# EAGLE board stencil_v2 (EAGLE 9.6.2)
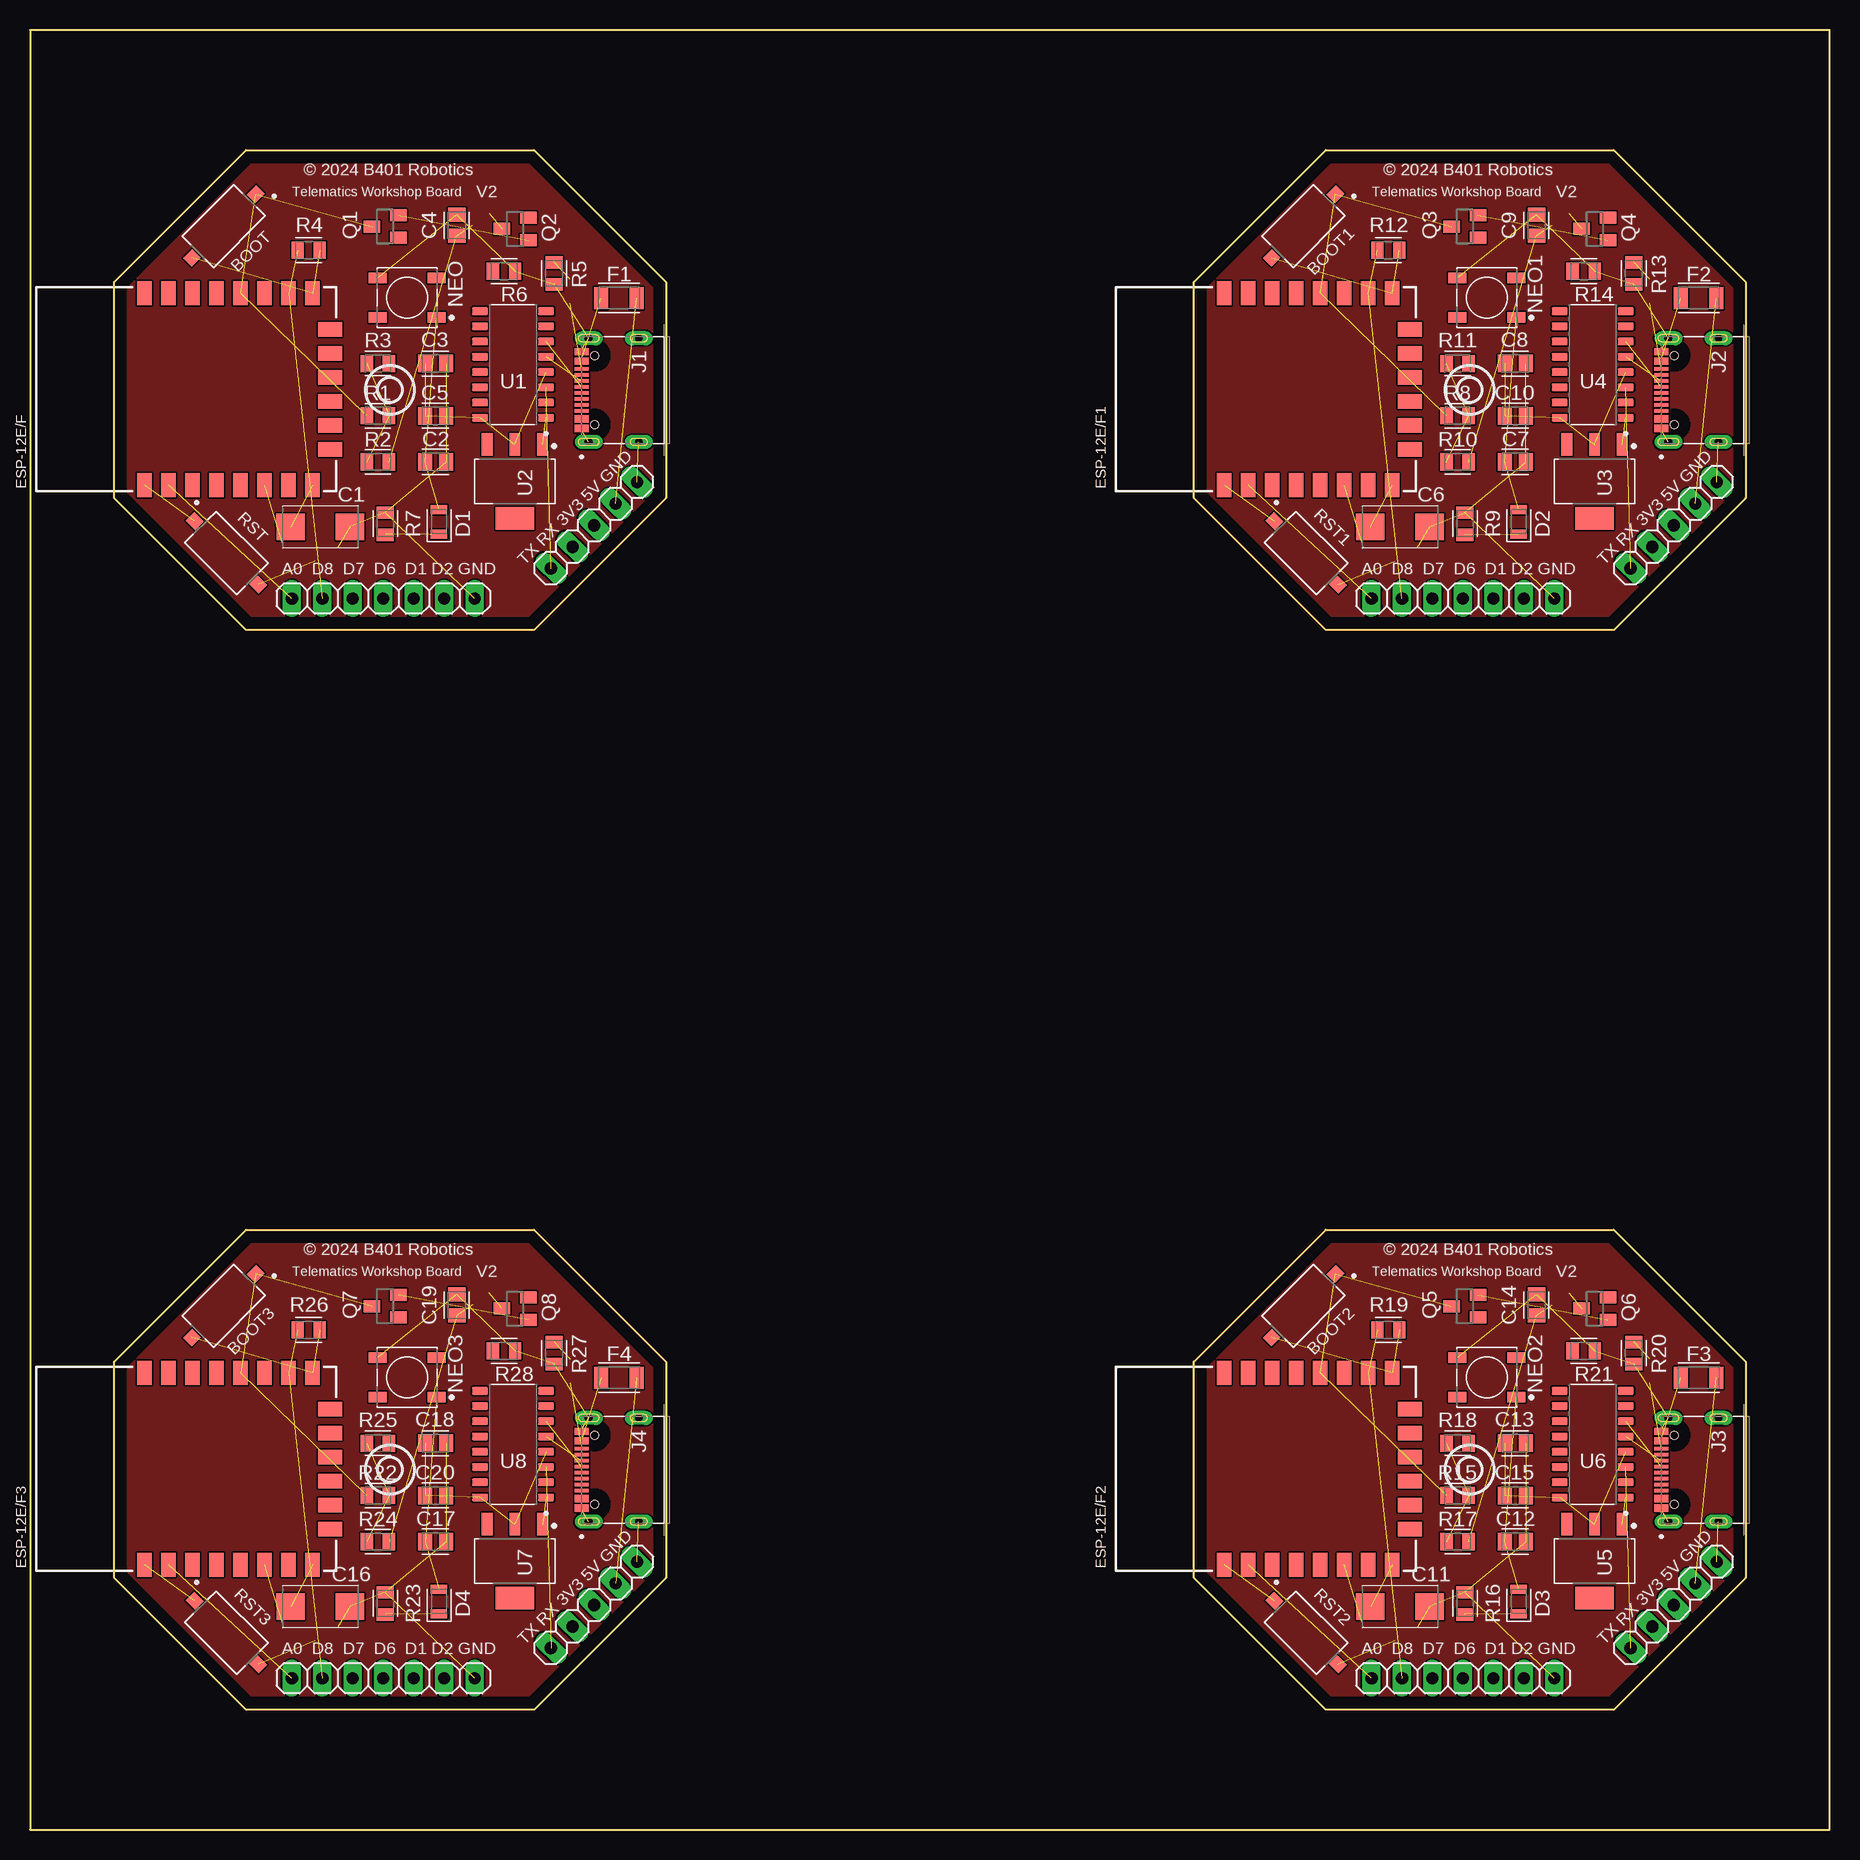
[diagram p0: board, top side]
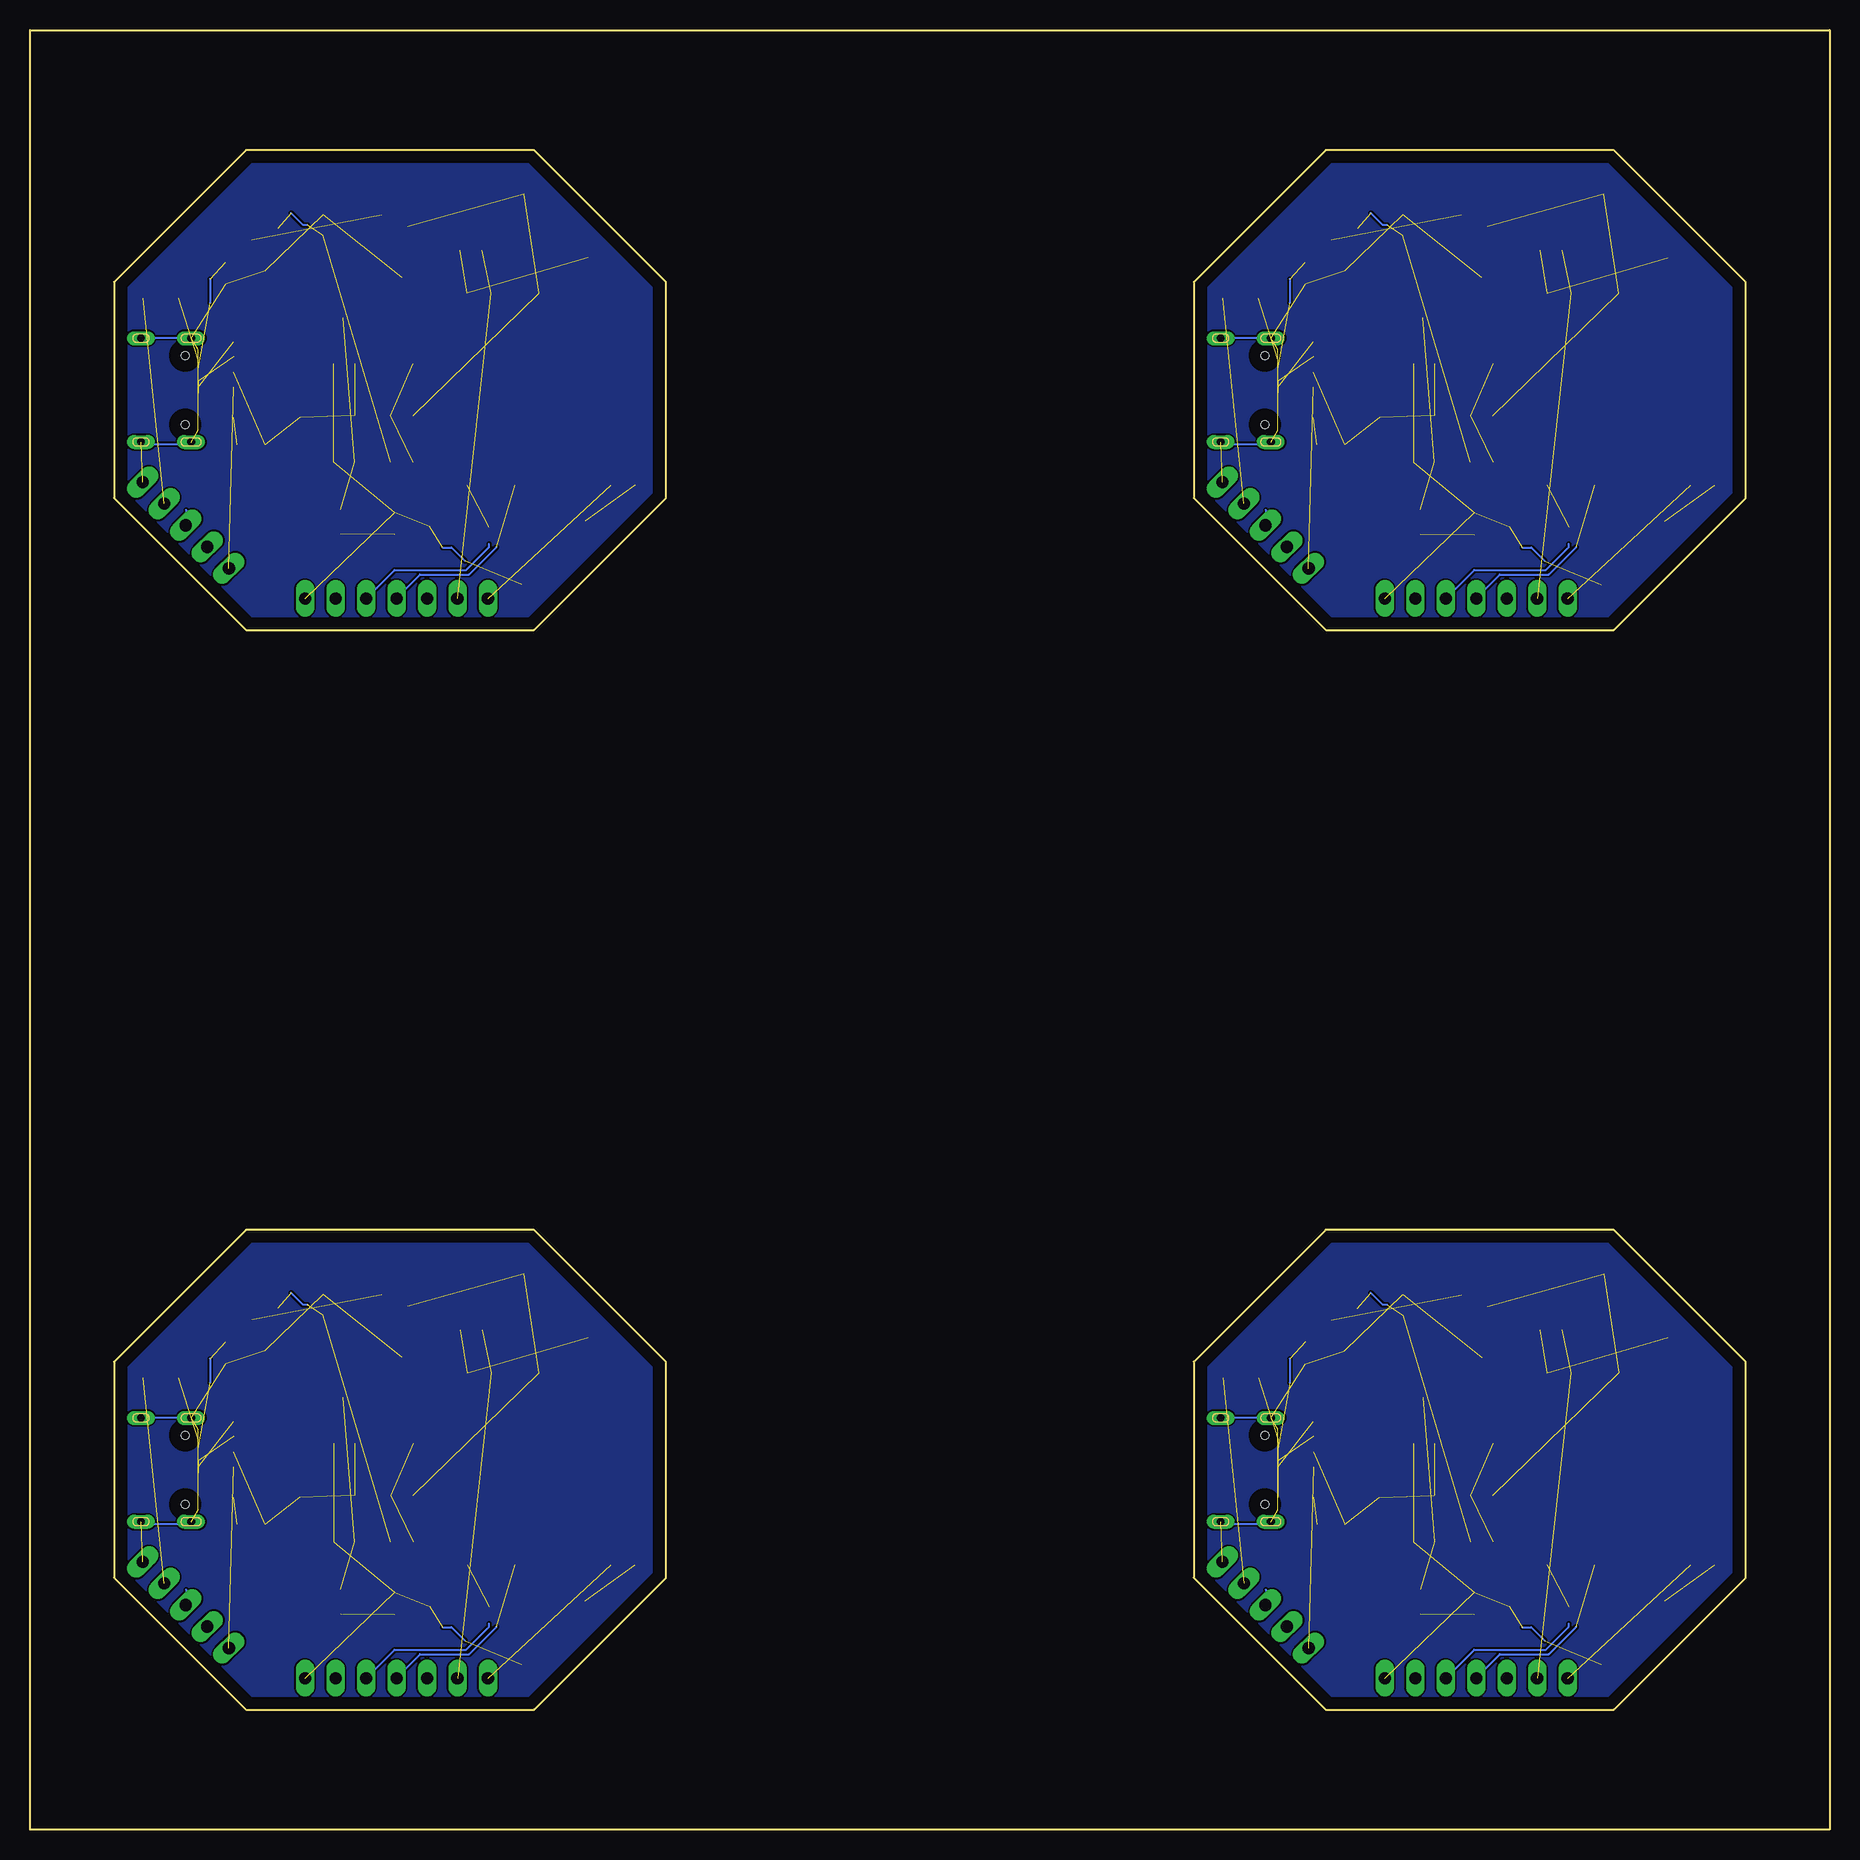
[diagram p1: board, bottom side, seen from below]

Size 150 x 150 mm. Coordinates in mm from the lower left corner, seen from the top.
Outline: 18,140 42,140 53,129 53,111 42,100 18,100 7,111 7,129 18,140
Outline: 108,140 132,140 143,129 143,111 132,100 108,100 97,111 97,129 108,140
Outline: 108,50 132,50 143,39 143,21 132,10 108,10 97,21 97,39 108,50
Outline: 18,50 42,50 53,39 53,21 42,10 18,10 7,21 7,39 18,50
Outline: 0,150 0,0 150,0 150,150 0,150
Copper layers (1*16): Top 0.035mm / dielectric 1.5mm / Bottom 0.035mm
Design rules "default *": minimum track width 6mil, minimum drill 0.35mm, track to track 6mil, track to pad 6mil, pad to pad 6mil, via to via 6mil, smd to smd 6mil, copper to edge 40mil, drill to drill 6mil, minimum pad ring 10mil, minimum via ring 8mil, stop-mask expansion 4mil, vias tented up to drill 0mil, thermal gap 10mil

## Footprints (pad centres in the part's own frame; a part is rotated, then mirrored left to right if it is on the bottom)
SWITCH-2P = smd 1.1 x 1: 1 -3.75,0; 2 3.75,0
CAPM6032X280 = smd 2.368 x 2.204: 1 -2.471,0; 2 2.471,0
CAPC2012X110 = smd 1.165 x 1.465: 1 -0.875,0; 2 0.875,0
LEDC2012X110N_FLAT-R = smd 0.762 x 1.362: A 1.025,0; C -1.025,0
ESP-12F = smd 2 x 1.2: 1 -8,3.48; 2 -8,1.48; 3 -8,-0.52; 4 -8,-2.52; 5 -8,-4.52; 6 -8,-6.52; 7 -8,-8.52; 8 -8,-10.52; 15 8,-10.52; 16 8,-8.52; 17 8,-6.52; 18 8,-4.52; 19 8,-2.52; 20 8,-0.52; 21 8,1.48; 22 8,3.48 | smd 1.2 x 2: 9 -5,-12; 10 -3,-12; 11 -1,-12; 12 1,-12; 13 3,-12; 14 5,-12
FUSC3215X82N = smd 1.165 x 1.814: 1 -1.475,0; 2 1.475,0
USB-C-16P = smd 0.3 x 1.14: A1 -3.35,0; A4 -2.55,0; A5 -1.25,0; A6 -0.25,0; A7 0.25,0; A8 1.25,0; A9 2.55,0; A12 3.35,0; B1 3.05,0; B4 2.25,0; B5 1.75,0; B6 0.75,0; B7 -0.75,0; B8 -1.75,0; B9 -2.25,0; B12 -3.05,0 | drill 0.65 pad 1 long: S1 -4.325,-0.59; S2 4.325,-0.59 | drill 0.65 pad 0.9 long: S3 -4.325,-4.77; S4 4.325,-4.77 | hole 0.65: -2.89,-1.07; 2.89,-1.07
1X05 = drill 1.016 long: 1 -5.08,0; 2 -2.54,0; 3 0,0; 4 2.54,0; 5 5.08,0
1X07 = drill 1.016 long: 1 -7.62,0; 2 -5.08,0; 3 -2.54,0; 4 0,0; 5 2.54,0; 6 5.08,0; 7 7.62,0
WS2812B = smd 1.5 x 0.9: 1 -2.45,1.65; 2 -2.45,-1.65; 3 2.45,-1.65; 4 2.45,1.65
SOT23 = smd 1 x 1.4: 1 -0.95,-1.1; 2 0.95,-1.1; 3 0,1.1
RESC2012X65 = smd 1.031 x 1.42: 1 -0.919,0; 2 0.919,0
SOIC127P600X180-16N = smd 1.31 x 0.62: 1 -2.75,4.445; 2 -2.75,3.175; 3 -2.75,1.905; 4 -2.75,0.635; 5 -2.75,-0.635; 6 -2.75,-1.905; 7 -2.75,-3.175; 8 -2.75,-4.445; 9 2.75,-4.445; 10 2.75,-3.175; 11 2.75,-1.905; 12 2.75,-0.635; 13 2.75,0.635; 14 2.75,1.905; 15 2.75,3.175; 16 2.75,4.445
SOT230P700X170-4 = smd 1.86 x 0.898: 1 -3.075,2.3; 2 -3.075,0; 3 -3.075,-2.3 | smd 1.86 x 3.189: 4 3.075,0

## Placement (x,y rotation side)
BOOT  BUTTON  [SWITCH-2P]  16.15,133.65 225 top
BOOT1  BUTTON  [SWITCH-2P]  106.15,133.65 225 top
BOOT2  BUTTON  [SWITCH-2P]  106.15,43.65 225 top
BOOT3  BUTTON  [SWITCH-2P]  16.15,43.65 225 top
C1  100µ  [CAPM6032X280]  24.2,108.59 180.1 top
C2  10µ  [CAPC2012X110]  33.8,114 0 top
C3  10µ  [CAPC2012X110]  33.8,122.2 0 top
C4  1µ  [CAPC2012X110]  35.57,133.72 90 top
C5  100n  [CAPC2012X110]  33.8,117.85 0 top
C6  100µ  [CAPM6032X280]  114.2,108.59 180.1 top
C7  10µ  [CAPC2012X110]  123.8,114 0 top
C8  10µ  [CAPC2012X110]  123.8,122.2 0 top
C9  1µ  [CAPC2012X110]  125.57,133.72 90 top
C10  100n  [CAPC2012X110]  123.8,117.85 0 top
C11  100µ  [CAPM6032X280]  114.2,18.59 180.1 top
C12  10µ  [CAPC2012X110]  123.8,24 0 top
C13  10µ  [CAPC2012X110]  123.8,32.2 0 top
C14  1µ  [CAPC2012X110]  125.57,43.72 90 top
C15  100n  [CAPC2012X110]  123.8,27.85 0 top
C16  100µ  [CAPM6032X280]  24.2,18.59 180.1 top
C17  10µ  [CAPC2012X110]  33.8,24 0 top
C18  10µ  [CAPC2012X110]  33.8,32.2 0 top
C19  1µ  [CAPC2012X110]  35.57,43.72 90 top
C20  100n  [CAPC2012X110]  33.8,27.85 0 top
D1  LED_RED  [LEDC2012X110N_FLAT-R]  34.1,109.01 90 top
D2  LED_RED  [LEDC2012X110N_FLAT-R]  124.1,109.01 90 top
D3  LED_RED  [LEDC2012X110N_FLAT-R]  124.1,19.01 90 top
D4  LED_RED  [LEDC2012X110N_FLAT-R]  34.1,19.01 90 top
ESP-12E/F  ESP-12F  [ESP-12F]  13.03,120.04 90 top
ESP-12E/F1  ESP-12F  [ESP-12F]  103.03,120.04 90 top
ESP-12E/F2  ESP-12F  [ESP-12F]  103.03,30.04 90 top
ESP-12E/F3  ESP-12F  [ESP-12F]  13.03,30.04 90 top
F1  FUSE PTC 1A  [FUSC3215X82N]  49.09,127.66 180 top
F2  FUSE PTC 1A  [FUSC3215X82N]  139.09,127.66 180 top
F3  FUSE PTC 1A  [FUSC3215X82N]  139.09,37.66 180 top
F4  FUSE PTC 1A  [FUSC3215X82N]  49.09,37.66 180 top
J1  USB-C  [USB-C-16P]  45.98,119.98 90 top
J2  USB-C  [USB-C-16P]  135.98,119.98 90 top
J3  USB-C  [USB-C-16P]  135.98,29.98 90 top
J4  USB-C  [USB-C-16P]  45.98,29.98 90 top
JP1  PINHD-1X5  [1X05]  47.01,108.71 225 top
JP2  HEADER_1X7  [1X07]  119.45,102.62 0 top
JP3  PINHD-1X5  [1X05]  137.01,108.71 225 top
JP4  HEADER_1X7  [1X07]  29.45,102.62 0 top
JP5  HEADER_1X7  [1X07]  119.45,12.62 0 top
JP6  PINHD-1X5  [1X05]  137.01,18.71 225 top
JP7  HEADER_1X7  [1X07]  29.45,12.62 0 top
JP8  PINHD-1X5  [1X05]  47.01,18.71 225 top
NEO  WS2812B  [WS2812B]  31.43,127.68 180 top
NEO1  WS2812B  [WS2812B]  121.43,127.68 180 top
NEO2  WS2812B  [WS2812B]  121.43,37.68 180 top
NEO3  WS2812B  [WS2812B]  31.43,37.68 180 top
Q1  BSS138  [SOT23]  29.61,133.62 90 top
Q2  BSS138  [SOT23]  40.44,133.42 90 top
Q3  BSS138  [SOT23]  119.61,133.62 90 top
Q4  BSS138  [SOT23]  130.44,133.42 90 top
Q5  BSS138  [SOT23]  119.61,43.62 90 top
Q6  BSS138  [SOT23]  130.44,43.42 90 top
Q7  BSS138  [SOT23]  29.61,43.62 90 top
Q8  BSS138  [SOT23]  40.44,43.42 90 top
R1  10K  [RESC2012X65]  29,117.85 0 top
R2  10k  [RESC2012X65]  29,114 180 top
R3  10K  [RESC2012X65]  29,122.2 180.2 top
R4  10K  [RESC2012X65]  23.23,131.64 0 top
R5  5.1K  [RESC2012X65]  43.69,129.71 90 top
R6  5.1K  [RESC2012X65]  39.52,129.9 180 top
R7  1K  [RESC2012X65]  29.62,108.85 270 top
R8  10K  [RESC2012X65]  119,117.85 0 top
R9  1K  [RESC2012X65]  119.62,108.85 270 top
R10  10k  [RESC2012X65]  119,114 180 top
R11  10K  [RESC2012X65]  119,122.2 180.2 top
R12  10K  [RESC2012X65]  113.23,131.64 0 top
R13  5.1K  [RESC2012X65]  133.69,129.71 90 top
R14  5.1K  [RESC2012X65]  129.52,129.9 180 top
R15  10K  [RESC2012X65]  119,27.85 0 top
R16  1K  [RESC2012X65]  119.62,18.85 270 top
R17  10k  [RESC2012X65]  119,24 180 top
R18  10K  [RESC2012X65]  119,32.2 180.2 top
R19  10K  [RESC2012X65]  113.23,41.64 0 top
R20  5.1K  [RESC2012X65]  133.69,39.71 90 top
R21  5.1K  [RESC2012X65]  129.52,39.9 180 top
R22  10K  [RESC2012X65]  29,27.85 0 top
R23  1K  [RESC2012X65]  29.62,18.85 270 top
R24  10k  [RESC2012X65]  29,24 180 top
R25  10K  [RESC2012X65]  29,32.2 180.2 top
R26  10K  [RESC2012X65]  23.23,41.64 0 top
R27  5.1K  [RESC2012X65]  43.69,39.71 90 top
R28  5.1K  [RESC2012X65]  39.52,39.9 180 top
RST  BUTTON  [SWITCH-2P]  16.38,106.41 315 top
RST1  BUTTON  [SWITCH-2P]  106.38,106.41 315 top
RST2  BUTTON  [SWITCH-2P]  106.38,16.41 315 top
RST3  BUTTON  [SWITCH-2P]  16.38,16.41 315 top
U1  CH340  [SOIC127P600X180-16N]  40.26,122.12 180 top
U2  NCP1117ST33T3G  [SOT230P700X170-4]  40.42,112.38 270 top
U3  NCP1117ST33T3G  [SOT230P700X170-4]  130.42,112.38 270 top
U4  CH340  [SOIC127P600X180-16N]  130.26,122.12 180 top
U5  NCP1117ST33T3G  [SOT230P700X170-4]  130.42,22.38 270 top
U6  CH340  [SOIC127P600X180-16N]  130.26,32.12 180 top
U7  NCP1117ST33T3G  [SOT230P700X170-4]  40.42,22.38 270 top
U8  CH340  [SOIC127P600X180-16N]  40.26,32.12 180 top

## Library data of the parts
BOOT BOOT1-BOOT3 RST RST1-RST3 = WorTel Libray 2024; MANUFACTURER: CUI Devices; MAXIMUM_PACKAGE_HEIGHT: 2.5 mm; PARTREV: 1.0; STANDARD: Manufacturer Recommendations
C1-C20 = Capacitor; CATEGORY: Capacitor
D1-D4 = LED; CATEGORY: LED; COLOR: RED; DESCRIPTION: CHIP LED FLAT; SUB-CATEGORY: CHIP; TYPE: FLAT_TOP
ESP-12E/F ESP-12E/F1-ESP-12E/F3 = WorTel Libray 2024
F1-F4 = Circuit-Protection; CATEGORY: Circuit-Protection; SUB-CATEGORY: Fuse
J1-J4 = WorTel Libray 2024; AVAILABILITY: In Stock; CHECK_PRICES: https://www.snapeda.com/parts/CSP-USC16-TR/Valcon/view-part/?ref=eda; DESCRIPTION: CSP-USC16-TR Valcon USB Type C Surface Mount PCB Socket; MF: Valcon; MP: CSP-USC16-TR; PACKAGE: None; PRICE: None; SNAPEDA_LINK: https://www.snapeda.com/parts/CSP-USC16-TR/Valcon/view-part/?ref=snap
JP1 JP3 JP6 JP8 = WorTel Libray 2024; CATEGORY: Headers; DESCRIPTION: Header, Straight, 5 Position; MANUFACTURER: Generic; MPN: Generic; OPERATING_TEMPERATURE: Generic; PART_STATUS: Active; PITCH: 0.100" (2.54mm); ROHS_COMPLIANCE: Generic; SERIES: Generic; SUB-CATEGORY: Headers, Male Pins; TYPE: Board to Board or Cable, Unshrouded, Through Hole, Straight
JP2 JP4 JP5 JP7 = WorTel Libray 2024; CATEGORY: Headers; DESCRIPTION: Header, Straight, 7 Position; MANUFACTURER: Generic; MPN: Generic; OPERATING_TEMPERATURE: Generic; PART_STATUS: Active; PITCH: 0.100" (2.54mm); ROHS_COMPLIANCE: Generic; SERIES: Generic; SUB-CATEGORY: Headers, Male Pins; TYPE: Board to Board or Cable, Unshrouded, Through Hole, Straight
NEO NEO1-NEO3 = LED; CATEGORY: LED; COLOR: RGB; DESCRIPTION: LED integrated light source; MANUFACTURER: Worldsemi; MPN: WS2812B; OPERATING_TEMP: -25 ℃ to +80℃(TJ); PART_STATUS: Active; SUB_CATEGORY: RGB
Q1-Q8 = Transistor; CATEGORY: Transistor; SUB-CATEGORY: MOSFET; TYPE: N-Channel
R1-R28 = Resistor; CATEGORY: Resistor; SUB-CATEGORY: Fixed
U1 U4 U6 U8 = WorTel Libray 2024; AVAILABILITY: Not in stock; CHECK_PRICES: https://www.snapeda.com/parts/CH340C/WCH/view-part/?ref=eda; DESCRIPTION: USB to serial chip CH340; MF: WCH; MP: CH340C; PACKAGE: None; PRICE: None; SNAPEDA_LINK: https://www.snapeda.com/parts/CH340C/WCH/view-part/?ref=snap
U2 U3 U5 U7 = IC_Power-Management; CATEGORY: IC_Power-Management; MANUFACTURER: ON Semiconductor; MPN: NCP1117ST33T3G; OPERATING_TEMP: 0 to +125 °C; PART_STATUS: Active; ROHS_COMPLIANT: RoHS3 Compliant; SERIES: NCP1117, NCV1117; SUB-CATEGORY: Voltage Regulator; TYPE: Linear

## Nets
+3.3V: C3.1 C5.1 U1.4 U1.16 U2.2
+3.3V1: C8.1 C10.1 U3.2 U4.4 U4.16
+3.3V2: C13.1 C15.1 U5.2 U6.4 U6.16
+3.3V3: C18.1 C20.1 U7.2 U8.4 U8.16
+5V: F1.1 JP1.2
+5V1: F2.1 JP3.2
+5V2: F3.1 JP6.2
+5V3: F4.1 JP8.2
+5V_BF: F1.2 J1.A4 J1.A9 J1.B4 J1.B9
+5V_BF1: F2.2 J2.A4 J2.A9 J2.B4 J2.B9
+5V_BF2: F3.2 J3.A4 J3.A9 J3.B4 J3.B9
+5V_BF3: F4.2 J4.A4 J4.A9 J4.B4 J4.B9
ADC0: ESP-12E/F.2 JP4.1
ADC1: ESP-12E/F1.2 JP2.1
ADC2: ESP-12E/F2.2 JP5.1
ADC3: ESP-12E/F3.2 JP7.1
EN: ESP-12E/F.3
EN1: ESP-12E/F1.3
EN2: ESP-12E/F2.3
EN3: ESP-12E/F3.3
ESP_RX: JP1.4
ESP_RX1: JP3.4
ESP_RX2: JP6.4
ESP_RX3: JP8.4
ESP_TX: JP1.5 U1.3
ESP_TX1: JP3.5 U4.3
ESP_TX2: JP6.5 U6.3
ESP_TX3: JP8.5 U8.3
EXP_RX: U1.2
EXP_RX1: U4.2
EXP_RX2: U6.2
EXP_RX3: U8.2
GND: C4.2 J1.A1 J1.A12 J1.B1 J1.B12 J1.S1 J1.S2 J1.S3 J1.S4 JP1.1 NEO.3 R5.1 R6.1
GND1: C9.2 J2.A1 J2.A12 J2.B1 J2.B12 J2.S1 J2.S2 J2.S3 J2.S4 JP3.1 NEO1.3 R13.1 R14.1
GND2: C14.2 J3.A1 J3.A12 J3.B1 J3.B12 J3.S1 J3.S2 J3.S3 J3.S4 JP6.1 NEO2.3 R20.1 R21.1
GND3: C19.2 J4.A1 J4.A12 J4.B1 J4.B12 J4.S1 J4.S2 J4.S3 J4.S4 JP8.1 NEO3.3 R27.1 R28.1
IO0: BOOT.1 ESP-12E/F.18 Q1.3 R1.1
IO1: BOOT1.1 ESP-12E/F1.18 Q3.3 R8.1
IO2: ESP-12E/F.17
IO3: ESP-12E/F1.6 JP2.4
IO4: ESP-12E/F.19
IO5: ESP-12E/F.20
IO6: JP2.3
IO7: ESP-12E/F1.5
IO8: ESP-12E/F1.19
IO9: ESP-12E/F1.20
IO10: ESP-12E/F1.4
IO11: ESP-12E/F1.17
IO12: ESP-12E/F.6 JP4.4
IO13: JP4.3
IO14: ESP-12E/F.5
IO15: ESP-12E/F.16 JP4.2 R4.1
IO16: ESP-12E/F.4
IO17: ESP-12E/F1.16 JP2.2 R12.1
IO18: BOOT2.1 ESP-12E/F2.18 Q5.3 R15.1
IO19: ESP-12E/F2.6 JP5.4
IO20: JP5.3
IO21: ESP-12E/F2.5
IO22: ESP-12E/F2.19
IO23: ESP-12E/F2.20
IO24: ESP-12E/F2.4
IO25: ESP-12E/F2.17
IO26: ESP-12E/F2.16 JP5.2 R19.1
IO27: BOOT3.1 ESP-12E/F3.18 Q7.3 R22.1
IO28: ESP-12E/F3.6 JP7.4
IO29: JP7.3
IO30: ESP-12E/F3.5
IO31: ESP-12E/F3.19
IO32: ESP-12E/F3.20
IO33: ESP-12E/F3.4
IO34: ESP-12E/F3.17
IO35: ESP-12E/F3.16 JP7.2 R26.1
N$1: J1.A6 J1.B6 U1.5
N$2: J1.A7 J1.B7 U1.6
N$4: Q1.2 Q2.1
N$5: J1.B5 R5.2
N$6: R6.2
N$8: Q2.2
N$9: D1.C R7.2
N$10: D2.C R9.2
N$11: J2.A6 J2.B6 U4.5
N$12: J2.A7 J2.B7 U4.6
N$13: Q3.2 Q4.1
N$14: Q4.2
N$15: J2.B5 R13.2
N$16: R14.2
N$19: D3.C R16.2
N$20: J3.A6 J3.B6 U6.5
N$21: J3.A7 J3.B7 U6.6
N$22: Q5.2 Q6.1
N$23: Q6.2
N$24: J3.B5 R20.2
N$25: R21.2
N$28: D4.C R23.2
N$29: J4.A6 J4.B6 U8.5
N$30: J4.A7 J4.B7 U8.6
N$31: Q7.2 Q8.1
N$32: Q8.2
N$33: J4.B5 R27.2
N$34: R28.2
RST: C4.1 Q2.3 R2.1
RST1: C9.1 Q4.3 R10.1
RST2: C14.1 Q6.3 R17.1
RST3: C19.1 Q8.3 R24.1
S$1: C1.2 ESP-12E/F.8
S$2: R1.2 R2.2 R3.2
S$3: JP1.3
S$4: C1.1 C2.2 C3.2 C5.2 JP4.7 R7.1 RST.2
S$5: U1.1 U2.1
S$6: BOOT.2 ESP-12E/F.15 R4.2
S$7: ESP-12E/F.1 RST.1
S$8: R3.1
S$9: ESP-12E/F.21
S$10: ESP-12E/F.22
S$11: C2.1 D1.A NEO.1
S$12: U2.3
S$13: ESP-12E/F.7
S$14: NEO.4
S$15: JP4.6
S$16: JP4.5
S$17: U1.13
S$18: Q1.1
S$19: U1.14
S$20: J1.A5
S$21: C6.2 ESP-12E/F1.8
S$22: R8.2 R10.2 R11.2
S$23: JP3.3
S$24: U3.1 U4.1
S$25: C6.1 C7.2 C8.2 C10.2 JP2.7 R9.1 RST1.2
S$26: BOOT1.2 ESP-12E/F1.15 R12.2
S$27: ESP-12E/F1.1 RST1.1
S$28: R11.1
S$29: ESP-12E/F1.21
S$30: ESP-12E/F1.22
S$31: U3.3
S$32: C7.1 D2.A NEO1.1
S$33: ESP-12E/F1.7
S$34: NEO1.4
S$35: JP2.6
S$36: JP2.5
S$37: U4.13
S$38: Q3.1
S$39: U4.14
S$40: J2.A5
S$41: C11.2 ESP-12E/F2.8
S$42: R15.2 R17.2 R18.2
S$43: JP6.3
S$44: U5.1 U6.1
S$45: C11.1 C12.2 C13.2 C15.2 JP5.7 R16.1 RST2.2
S$46: BOOT2.2 ESP-12E/F2.15 R19.2
S$47: ESP-12E/F2.1 RST2.1
S$48: R18.1
S$49: ESP-12E/F2.21
S$50: ESP-12E/F2.22
S$51: U5.3
S$52: C12.1 D3.A NEO2.1
S$53: ESP-12E/F2.7
S$54: NEO2.4
S$55: JP5.6
S$56: JP5.5
S$57: U6.13
S$58: Q5.1
S$59: U6.14
S$60: J3.A5
S$61: C16.2 ESP-12E/F3.8
S$62: R22.2 R24.2 R25.2
S$63: JP8.3
S$64: U7.1 U8.1
S$65: C16.1 C17.2 C18.2 C20.2 JP7.7 R23.1 RST3.2
S$66: BOOT3.2 ESP-12E/F3.15 R26.2
S$67: ESP-12E/F3.1 RST3.1
S$68: R25.1
S$69: ESP-12E/F3.21
S$70: ESP-12E/F3.22
S$71: U7.3
S$72: C17.1 D4.A NEO3.1
S$73: ESP-12E/F3.7
S$74: NEO3.4
S$75: JP7.6
S$76: JP7.5
S$77: U8.13
S$78: Q7.1
S$79: U8.14
S$80: J4.A5

## Tracks (layer width: path | path; a pad name or v marks a point on that pad's centre or on a via)
+3.3V  (4 unrouted)
+3.3V1  (4 unrouted)
+3.3V2  (4 unrouted)
+3.3V3  (4 unrouted)
+5V  (1 unrouted)
+5V1  (1 unrouted)
+5V2  (1 unrouted)
+5V3  (1 unrouted)
+5V_BF  (4 unrouted)
+5V_BF1  (4 unrouted)
+5V_BF2  (4 unrouted)
+5V_BF3  (4 unrouted)
ADC0  (1 unrouted)
ADC1  (1 unrouted)
ADC2  (1 unrouted)
ADC3  (1 unrouted)
ESP_TX  (1 unrouted)
ESP_TX1  (1 unrouted)
ESP_TX2  (1 unrouted)
ESP_TX3  (1 unrouted)
GND  (10 unrouted)
  Bottom 0.152: 46.75,115.5 46.62,115.62 J1.S1 46.75,115.5 | 46.75,115.5 50.5,115.5 50.62,115.62 J1.S3 | J1.S2 46.62,124.38 50.62,124.38 J1.S4
GND1  (10 unrouted)
  Bottom 0.152: 136.75,115.5 136.62,115.62 J2.S1 136.75,115.5 | 136.75,115.5 140.5,115.5 140.62,115.62 J2.S3 | J2.S2 136.62,124.38 140.62,124.38 J2.S4
GND2  (10 unrouted)
  Bottom 0.152: 136.75,25.5 136.62,25.62 J3.S1 136.75,25.5 | 136.75,25.5 140.5,25.5 140.62,25.62 J3.S3 | J3.S2 136.62,34.38 140.62,34.38 J3.S4
GND3  (10 unrouted)
  Bottom 0.152: 46.75,25.5 46.62,25.62 J4.S1 46.75,25.5 | 46.75,25.5 50.5,25.5 50.62,25.62 J4.S3 | J4.S2 46.62,34.38 50.62,34.38 J4.S4
IO0  (3 unrouted)
IO1  (3 unrouted)
IO3  (1 unrouted)
  Bottom 0.152: JP2.4 119.5,102.62 117.5,104.62 113.4,104.62 111.12,106.9
IO12  (1 unrouted)
  Bottom 0.152: JP4.4 29.5,102.62 27.5,104.62 23.4,104.62 21.12,106.9
IO15  (2 unrouted)
IO17  (2 unrouted)
IO18  (3 unrouted)
IO19  (1 unrouted)
  Bottom 0.152: JP5.4 119.5,12.62 117.5,14.62 113.4,14.62 111.12,16.9
IO26  (2 unrouted)
IO27  (3 unrouted)
IO28  (1 unrouted)
  Bottom 0.152: JP7.4 29.5,12.62 27.5,14.62 23.4,14.62 21.12,16.9
IO35  (2 unrouted)
N$1  (2 unrouted)
N$2  (2 unrouted)
N$3
  pour Top: 53.92,111.03 53.92,129.42 53.48,129.42 53.46,129.44 42.47,140.42 17.53,140.42 6.58,129.47 6.58,110.53 17.53,99.58 42.47,99.58
N$4  (1 unrouted)
N$5  (2 unrouted)
  Bottom 0.152: 45,129.25 45,127.25
N$7
  pour Bottom: 53.92,111.03 53.92,129.42 53.48,129.42 53.46,129.44 42.47,140.42 17.53,140.42 6.58,129.47 6.58,110.53 17.53,99.58 42.47,99.58
N$9  (1 unrouted)
N$10  (1 unrouted)
N$11  (2 unrouted)
N$12  (2 unrouted)
N$13  (1 unrouted)
N$15  (2 unrouted)
  Bottom 0.152: 135,129.25 135,127.25
N$17
  pour Top: 143.92,111.03 143.92,129.42 143.48,129.42 143.46,129.44 132.47,140.42 107.53,140.42 96.58,129.47 96.58,110.53 107.53,99.58 132.47,99.58
N$18
  pour Bottom: 143.92,111.03 143.92,129.42 143.48,129.42 143.46,129.44 132.47,140.42 107.53,140.42 96.58,129.47 96.58,110.53 107.53,99.58 132.47,99.58
N$19  (1 unrouted)
N$20  (2 unrouted)
N$21  (2 unrouted)
N$22  (1 unrouted)
N$24  (2 unrouted)
  Bottom 0.152: 135,39.25 135,37.25
N$26
  pour Top: 143.92,21.03 143.92,39.42 143.48,39.42 143.46,39.44 132.47,50.42 107.53,50.42 96.58,39.47 96.58,20.53 107.53,9.58 132.47,9.58
N$27
  pour Bottom: 143.92,21.03 143.92,39.42 143.48,39.42 143.46,39.44 132.47,50.42 107.53,50.42 96.58,39.47 96.58,20.53 107.53,9.58 132.47,9.58
N$28  (1 unrouted)
N$29  (2 unrouted)
N$30  (2 unrouted)
N$31  (1 unrouted)
N$33  (2 unrouted)
  Bottom 0.152: 45,39.25 45,37.25
N$35
  pour Top: 53.92,21.03 53.92,39.42 53.48,39.42 53.46,39.44 42.47,50.42 17.53,50.42 6.58,39.47 6.58,20.53 17.53,9.58 42.47,9.58
N$36
  pour Bottom: 53.92,21.03 53.92,39.42 53.48,39.42 53.46,39.44 42.47,50.42 17.53,50.42 6.58,39.47 6.58,20.53 17.53,9.58 42.47,9.58
RST  (3 unrouted)
  Bottom 0.152: 38.25,134.75 37.25,133.75 36.88,133.75
RST1  (3 unrouted)
  Bottom 0.152: 128.25,134.75 127.25,133.75 126.88,133.75
RST2  (3 unrouted)
  Bottom 0.152: 128.25,44.75 127.25,43.75 126.88,43.75
RST3  (3 unrouted)
  Bottom 0.152: 38.25,44.75 37.25,43.75 36.88,43.75
S$1  (1 unrouted)
S$2  (2 unrouted)
S$3
  Bottom 0.152: 47,110 47,109 JP1.3
S$4  (7 unrouted)
  Bottom 0.152: 23.75,105.75 24.88,106.88 25.62,106.88
S$5  (1 unrouted)
S$6  (2 unrouted)
S$7  (1 unrouted)
S$11  (2 unrouted)
S$15
  Bottom 0.152: JP4.6 34.5,102.62 34.38,102.62
S$16
  Bottom 0.152: 21.73,107.15 21.73,106.91 23.64,105 29.62,105 JP4.5
S$21  (1 unrouted)
S$22  (2 unrouted)
S$23
  Bottom 0.152: 137,110 137,109 JP3.3
S$24  (1 unrouted)
S$25  (7 unrouted)
  Bottom 0.152: 113.75,105.75 114.88,106.88 115.62,106.88
S$26  (2 unrouted)
S$27  (1 unrouted)
S$32  (2 unrouted)
S$35
  Bottom 0.152: JP2.6 124.5,102.62 124.38,102.62
S$36
  Bottom 0.152: 111.73,107.15 111.73,106.91 113.64,105 119.62,105 JP2.5
S$41  (1 unrouted)
S$42  (2 unrouted)
S$43
  Bottom 0.152: 137,20 137,19 JP6.3
S$44  (1 unrouted)
S$45  (7 unrouted)
  Bottom 0.152: 113.75,15.75 114.88,16.88 115.62,16.88
S$46  (2 unrouted)
S$47  (1 unrouted)
S$52  (2 unrouted)
S$55
  Bottom 0.152: JP5.6 124.5,12.62 124.38,12.62
S$56
  Bottom 0.152: 111.73,17.15 111.73,16.91 113.64,15 119.62,15 JP5.5
S$61  (1 unrouted)
S$62  (2 unrouted)
S$63
  Bottom 0.152: 47,20 47,19 JP8.3
S$64  (1 unrouted)
S$65  (7 unrouted)
  Bottom 0.152: 23.75,15.75 24.88,16.88 25.62,16.88
S$66  (2 unrouted)
S$67  (1 unrouted)
S$72  (2 unrouted)
S$75
  Bottom 0.152: JP7.6 34.5,12.62 34.38,12.62
S$76
  Bottom 0.152: 21.73,17.15 21.73,16.91 23.64,15 29.62,15 JP7.5

## Text on the board
tPlace: © 2024 B401 Robotics | © 2024 B401 Robotics | Telematics Workshop Board | V2 | Telematics Workshop Board | V2 | TX RX 3V3 5V GND | TX RX 3V3 5V GND | A0 D8 D7 D6 D1 D2 GND | A0 D8 D7 D6 D1 D2 GND | © 2024 B401 Robotics | © 2024 B401 Robotics | Telematics Workshop Board | V2 | Telematics Workshop Board | V2 | TX RX 3V3 5V GND | TX RX 3V3 5V GND | A0 D8 D7 D6 D1 D2 GND | A0 D8 D7 D6 D1 D2 GND